# Altium PCB uklad_pomiaru_pradu.PcbDoc
Units mil, origin at the board's own origin, x right, y up, seen from the top; angles counter-clockwise.
Board outline 2525 x 1225 mil, 2 copper layers (Top Layer, Bottom Layer); 14 components, 10 nets, 43 pads, 3 vias.
Unrouted connection lines stored in the file: 1.
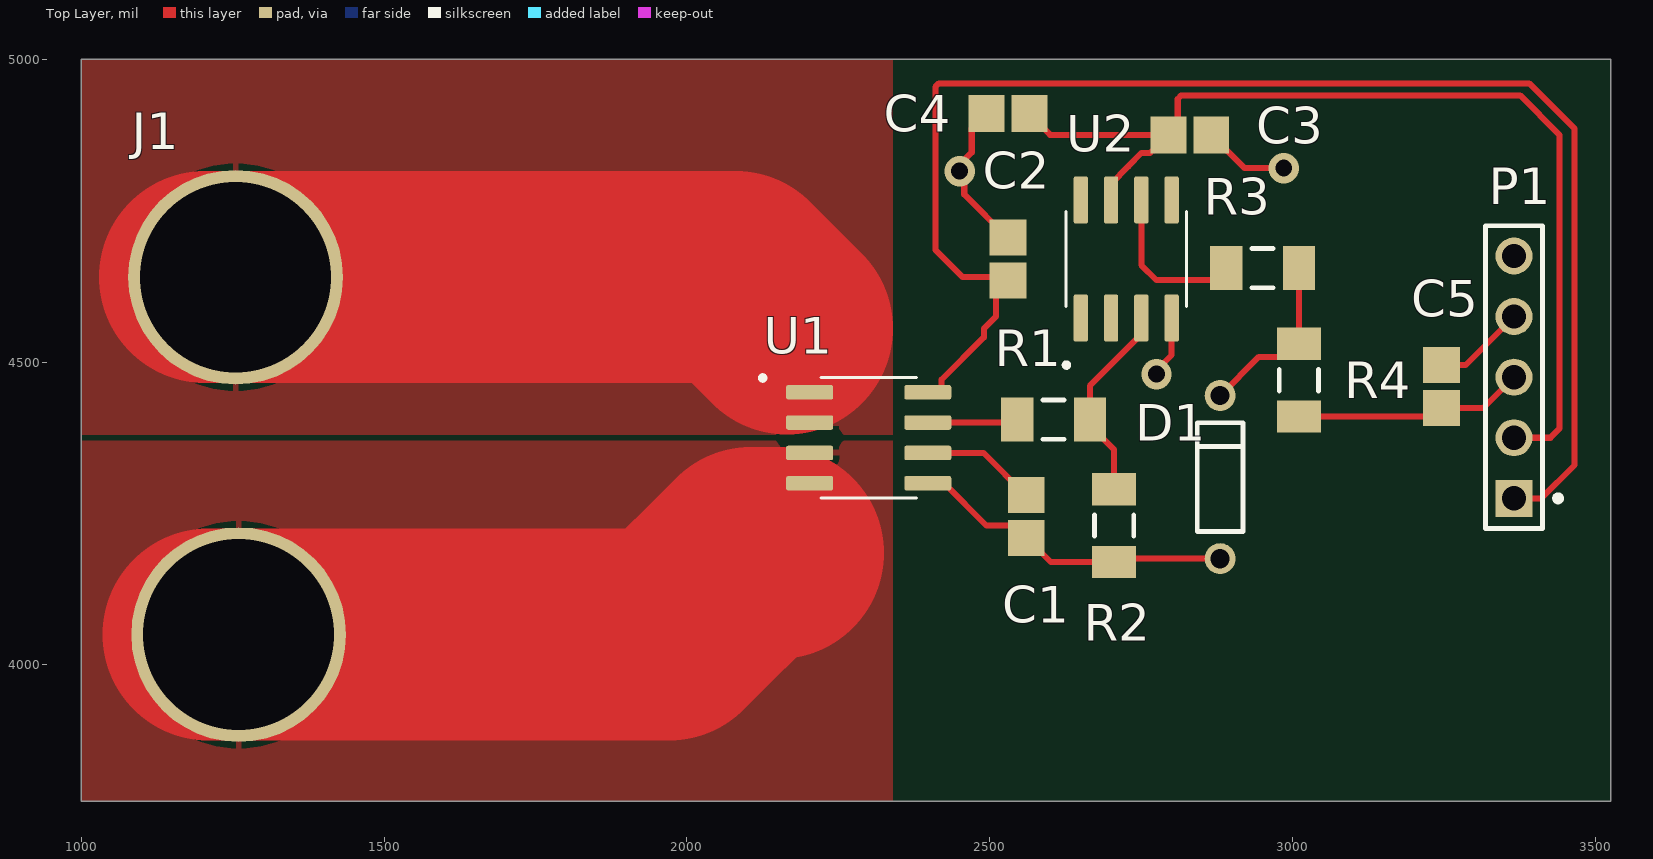
[diagram p0: Top Layer view]
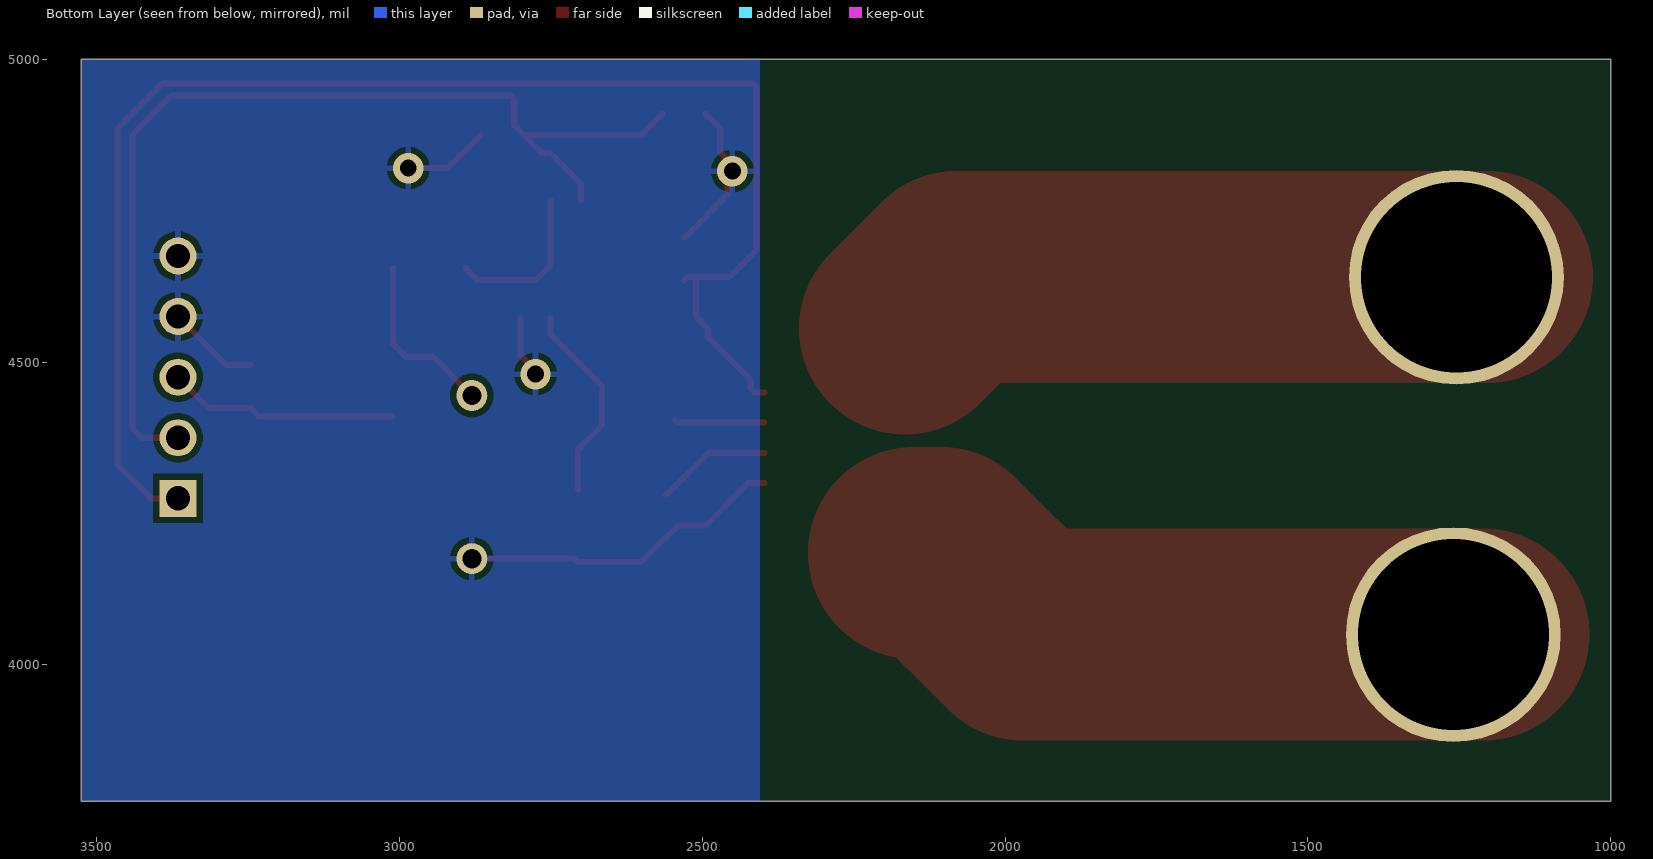
[diagram p1: Bottom Layer view, seen from below]

## Layer stack, top to bottom
Top Solder: solder mask 0.4, Solder Resist, Dk 3.5
Top Layer: signal copper 2.7559
Dielectric 1: dielectric 12.6, FR-4, Dk 4.8
Bottom Layer: signal copper 2.7559
Bottom Solder: solder mask 0.4, Solder Resist, Dk 3.5

## Board outline
1000,5000 1000,3775 3525,3775 3525,5000

## Design rules (kind name [scope] priority, off if disabled: settings)
Clearance [All] p1: gap=10 ignorepadtopadclearanceinfootprint=FALSE
PolygonConnect [All] p1: connectstyle=Relief reliefconductorwidth=10 reliefentries=4 polygonreliefangle="90 Angle" airgapwidth=10
RoutingVias [All] p1: holewidth=28 width=50 viastyle="Through Hole" minholewidth=28 minwidth=50 maxholewidth=28 maxwidth=50
SolderMaskExpansion [All] p1: expansion=4 istentingtop=FALSE
SupplyNets "Schematic Supply Nets_1" [InNet('+5')] p1: voltage=0.000
SupplyNets "Schematic Supply Nets" [InNet('GND')] p2: voltage=0.000
Width [All] p1: maxlimit=350 minlimit=10 preferedwidth=10 bottomlayer_maxwidth=10 minimp=50.000000 maximp=50.000000 favimp=50.000000
30 further rules are at their usual default settings.

## Components (designator, comment, footprint, x,y, rotation, side; value= is the part's Value field where it differs from the comment)
C1 "Capacitor 1 uF +/- 10% 25 V 0805" CAPC2013X145X50ML20T25 2560,4245 r270 top value=1nF
C2 "Capacitor 1 uF +/- 10% 25 V 0805" CAPC2013X145X50ML20T25 2530,4670 r270 top value=0.1µF
C3 "Capacitor 1 uF +/- 10% 25 V 0805" CAPC2013X145X50ML20T25 2830,4875 r180 top value=10µF
C4 "Capacitor 1 uF +/- 10% 25 V 0805" CAPC2013X145X50ML20T25 2530,4910 r0 top value=0.1µF
C5 "Capacitor 1 uF +/- 10% 25 V 0805" CAPC2013X145X50ML20T25 3245,4459.57 r270 top value=150nF
D1 "3,3V" FAIR-DO-35-2 2880,4310 r90 top
J1 "con_1" con_1 1255,4640 r0 top
P1 "77311-462K05LF" FCI-77311-5_V 3365,4475 r90 top
R1 "Resistor 100k +/-1% 1206 250 mW" RESC3216X60X45ML15T20 2605.04,4405 r0 top value="100k 0.1%"
R2 "Resistor 100k +/-1% 1206 250 mW" RESC3216X60X45ML15T20 2705,4230 r270 top value="200k 0.1%"
R3 "Resistor 100k +/-1% 1206 250 mW" RESC3216X60X45ML15T20 2950,4655 r180 top value=330R
R4 "Resistor 100k +/-1% 1206 250 mW" RESC3216X60X45ML15T20 3010,4470 r270 top value=10k
U1 "ACS714" SOIC127P600X175-8N 2300,4375 r0 top
U2 "MCP6G01" SOIC127P600X175-8N 2725,4670 r90 top

## Footprints (in the part's own frame and the unit in brackets; to place one, negate y for a bottom-side part, rotate by r counter-clockwise, add the part's x,y. Pads: shape width x height; smd on the part's side, far side on the other; paste and mask are expansions set on the pad)
CAPC2013X145X50ML20T25 [mm] "Chip Capacitor, 2-Leads, Body 2.2x1.45mm, IPC Low Density"
  rect 1.5x1.55 smd: 1(-0.9,0) 2(0.9,0)
  body extent -1.1,-0.72 1.1,0.73, height 1.45
con_1 [mm]
  round 9 hole 8: 1(0,0) 2(0.127,-14.986)
FAIR-DO-35-2 [mm] "TH, 2-Leads, Dia 1.91mm"
  round 1.3 hole 0.8: 1(-3.42,0) 2(3.42,0)
  silkscreen extent -2.28,-0.95 2.28,0.95, body extent -3.7,-0.95 3.7,0.95, height 1.91
FCI-77311-5_V [mm] "THD, 5-Leads, Body 12.7x2.4mm, Pitch 2.54mm"
  rect 1.55x1.55 hole 1.02: 1(-5.08,0)
  round 1.55 hole 1.02: 2(-2.54,0) 3(0,0) 4(2.54,0) 5(5.08,0)
  silkscreen extent -6.35,-1.97 6.35,1.2, body extent -6.35,-1.2 6.35,1.2, height 16.24
RESC3216X60X45ML15T20 [mm] "Chip Resistor, 2-Leads, Body 3.3x1.75mm, IPC Low Density"
  rect 1.35x1.85 smd: 1(-1.525,0) 2(1.525,0)
  silkscreen extent -0.45,-0.82 0.45,0.82, body extent -1.65,-0.87 1.65,0.87, height 0.6
SOIC127P600X175-8N [mm]
  rrect25% 1.97x0.6 smd: 1(-2.475,1.905) 2(-2.475,0.635) 3(-2.475,-0.635) 4(-2.475,-1.905) 5(2.475,-1.905) 6(2.475,-0.635) 7(2.475,0.635) 8(2.475,1.905)
  silkscreen extent -4.54,-2.52 2,2.6, body extent -3,-2.45 3,2.45, height 1.75

## Part data
C1 C2 C3 C4 C5: library part CMP-001-00010-6, "Chip Capacitor, 1 uF, +/-10%, 25 V, 0805 (2012 Metric)", Capacitor Type=Ceramic, Case/Package=0805, Max Operating Temperature=125°C, Min Operating Temperature=-55°C, Tolerance=10%, Voltage Rating=25V, Mounting Technology=SM, Pins=2, RoHS Compliant=True
D1: library part CMP-004-00021-2, "Zener Diode, 3.6 V, 5 mA, -65 to 200 degC, 2-Pin DO-35, RoHS, Bulk", Case/Package=DO-35-2, Forward Voltage=1.5V, Manufacturer="Fairchild Semiconductor", Max Operating Temperature=200°C, Min Operating Temperature=-65°C, Package Description="2-Pin Through Hole Diode, Dia 1.72 mm, Body Length 3.805 mm", Package Quantity=1000, Power=500mW, Tolerance=6%, Datasheet URL=https://www.fairchildsemi.com/datasheets/BZ/BZX79C3V6.pdf, Datasheet Version="Rev. C1, 07/2007", Impedance=90Ohm, Manufacturer URL=https://www.fairchildsemi.com/, Mounting Technology=TH, Package Reference=DO-35-2, Package URL=https://www.fairchildsemi.com/package-drawings/DO/DO35A.pdf, Packaging=Bulk, Pins=2, RoHS Compliant=True
P1: library part CMP-002-00021-2, "Male Header, Pitch 2.54 mm, 1 x 5 Position, Height 16.24 mm, Tail Length 3.05 mm, -65 to 125 degC, RoHS, Tape and Reel", Case/Package=77311-5, Manufacturer="FCI Electronics", Package Description="Male Header, Pitch 2.54 mm, 1 x 5 Position, Height 16.24 mm, Tail Length 3.05 mm", Connector Type=Header, Datasheet URL=http://portal.fciconnect.com/Comergent//fci/drawing/77311.pdf, Datasheet Version="Rev. CK, 07/2016", Gender=Male, Manufacturer URL=http://portal.fciconnect.com/, Mounting Technology=TH, Package Reference=77311-5, RoHS Compliant=Unknown
R1 R2 R3 R4: library part CMP-009-00025-5, "Chip Resistor, 100 KOhm, +/- 1%, 0.25 W, -55 to 155 degC, 1206 (3216 Metric)", Case/Package=1206, Max Operating Temperature=155°C, Min Operating Temperature=-55°C, Power=250mW, Tolerance=1%, Voltage Rating=200V, Mounting Technology=SM, Pins=2, RoHS Compliant=True

## Via types
v1: diameter 50, hole 28, Top Layer to Bottom Layer, 3 vias

## Nets (pads, with @x,y where several pads share a name; then routed paths per layer and width w, separated by ;. In a path a pad name is that pad's centre, name@x,y a point inside that pad or via, vN(x,y) a via of type N, cw(c..) or ccw(c..) an arc to the next point about the centre after c; other vN are vias at no path point)
+5: C2.2 C3.2 C4.2 P1.1 P1.2 U1.8 U2.7 | length 4113.4
  Top Layer w10: U1.8 2413.28,4450 2420.1,4456.81 2420.1,4470.95 2490,4540.86 2490,4555 2510,4575 C2.2@2510,4640 ; C2.2 2524.57,4640 C2.2@2510,4640 ; C4.2 2565.43,4909.02 2599.45,4875 C3.2 ; U2.7 2700,4794.41 2728.41,4822.81 2728.41,4823.41 2750,4845 2764.57,4845 2769.06,4849.49 2770.04,4849.49 2794.57,4874.02 C3.2 ; P1.1 3410,4275 3465,4330 3465,4885 3390,4960 2415.86,4960 2410,4954.14 2410,4685 2455,4640 C2.2@2510,4640 ; P1.2 3425,4375 3440,4390 3440,4875 3375,4940 2815.86,4940 2810,4934.14 2810,4890.43 C3.2
GND: C1.2 C2.1 C3.1 C4.1 C5.1 D1.1 P1.4 P1.5 R2.2 U1.5 U2.4 | length 1194.4
  Top Layer w10: U1.5 2424.41,4300 2494.41,4230 2539.57,4230 C1.2 2560.98,4209.57 2600.59,4169.96 R2.2 2710.39,4175.35 D1.1 ; C4.1 2470.04,4885.47 2470.04,4845.86 2450,4825.82 v1(2450,4815) 2457.65,4807.35 2457.65,4776.8 2529.02,4705.43 C2.1 ; v1(2775,4480) 2775,4486.57 2800,4511.57 U2.4 ; C3.1 2865.43,4874.02 2889.96,4849.49 2890.94,4849.49 2920.43,4820 v1(2985,4820) ; C5.1 3285,4495 P1.4
NetC1_1: C1.1 U1.6 | length 191.4
  Top Layer w10: U1.6 2489.45,4350 2559.02,4280.43 C1.1
NetC5_2: C5.2 P1.3 R4.2 | length 381.9
  Top Layer w10: R4.2 3230.83,4409.96 C5.2 3314.13,4424.13 P1.3
NetD1_2: D1.2 R3.1 R4.1 | length 290.3
  Top Layer w10: D1.2 2943.82,4508.46 2988.43,4508.46 R4.1 3010.04,4530.08 R3.1
NetJ1_1: J1.1 U1.1 U1.2 | length 995.2
  Top Layer w350: J1.1@1205,4640 J1.1 2080,4640 2165,4555
NetJ1_2: J1.2 U1.3 U1.4 | length 995.9
  Top Layer w350: J1.2@1210,4050 J1.2 1970.57,4050 2105.57,4185 2150,4185
NetR1_1: R1.1 U1.7 | length 149.6
  Top Layer w10: U1.7 2540,4400 R1.1
NetR1_2: R1.2 R2.1 U2.3 | length 334.2
  Top Layer w10: R2.1 2705,4355.24 2665.08,4395.16 R1.2 2665.08,4460.67 2750,4545.59 U2.3
NetR3_2: R3.2 U2.6 | length 266
  Top Layer w10: U2.6 2750,4660 2775,4635 2869.96,4635 R3.2
pads on no net: U2.1 U2.2 U2.5 U2.8

## Polygon pours and split planes (outlines as drawn)
GND on Bottom Layer "GND" (solid, pour order 0): 3525,5000 3525,3775 2405,3775 2405,5000
NetJ1_2 on Top Layer "IP+" (solid, pour order 3): 2340,4370 1000,4370 1000,3775 2340,3775
NetJ1_1 on Top Layer "IP+" (solid, pour order 2): 2340,5000 2340,4380 1000,4380 1000,5000

## Silkscreen, mask and mechanical layers (free items; w line width, h text height)
Board Shape:
  lines w0.1: 1000,3775 3210,3775 3525,3775 3525,5000 1000,5000 1000,3775